# Altium PCB Multipler.PcbDoc
Units mil, origin at the board's own origin, x right, y up, seen from the top; angles counter-clockwise.
Board outline 6000 x 4000 mil, 2 copper layers (Top Layer, Bottom Layer); 13 components, 48 nets, 176 pads, 0 vias.
Unrouted connection lines stored in the file: 102.
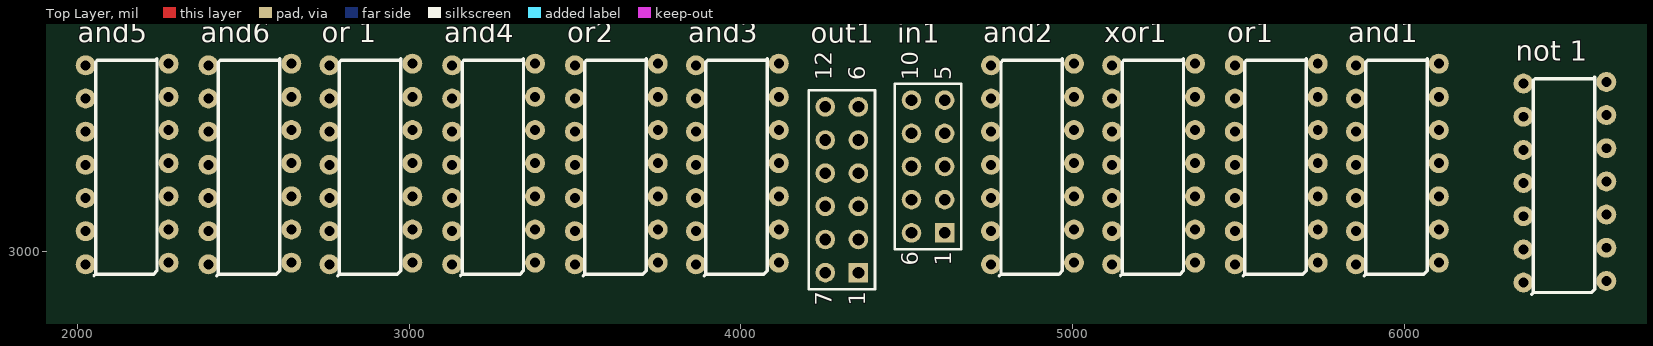
[diagram p0: Top Layer view]
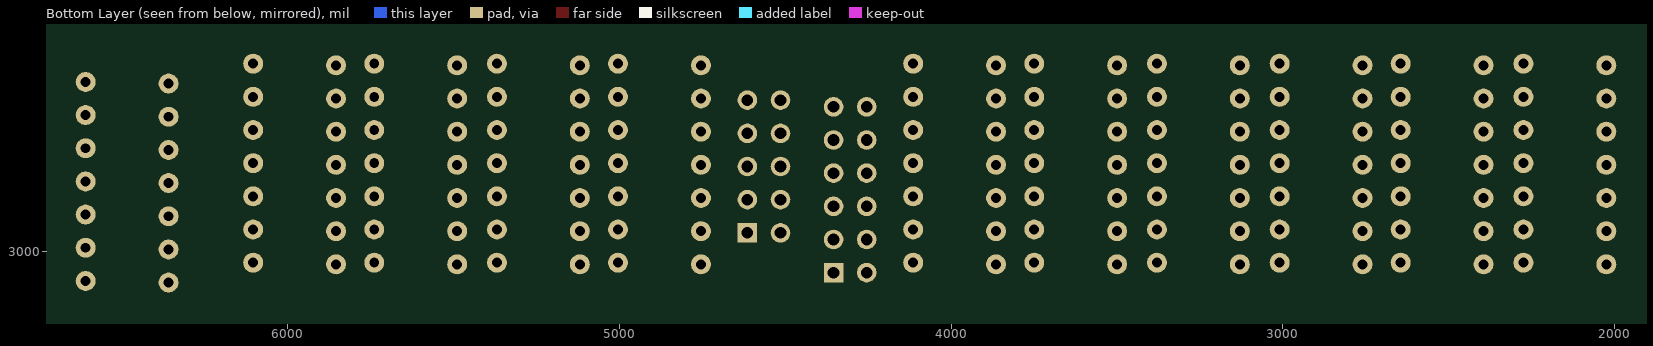
[diagram p1: Bottom Layer view, seen from below]

## Layer stack, top to bottom
Top Solder: solder mask 0.4, Solder Resist, Dk 3.5
Top Layer: signal copper 1.4
Dielectric 1: dielectric 12.6, FR-4, Dk 4.8
Bottom Layer: signal copper 1.4
Bottom Solder: solder mask 0.4, Solder Resist, Dk 3.5

## Board outline
1000,1000 7000,1000 7000,5000 1000,5000

## Design rules (kind name [scope] priority, off if disabled: settings)
Clearance [All] p1: gap=10 ignorepadtopadclearanceinfootprint=FALSE except(0: Arc-Hole Track-Hole SMDPad-Hole THPad-Hole Via-Hole Fill-Hole Poly-Hole Region-Hole Text-Hole)
PolygonConnect [All] p1: connectstyle=Relief reliefconductorwidth=10 reliefentries=4 polygonreliefangle="90 Angle" airgapwidth=10
RoutingVias [All] p1: holewidth=28 width=50 viastyle="Through Hole" minholewidth=28 minwidth=50 maxholewidth=28 maxwidth=50
SolderMaskExpansion [All] p1: expansion=4
Width [All] p1: maxlimit=10 minlimit=10 preferedwidth=10
30 further rules are at their usual default settings.

## Components (designator, comment, footprint, x,y, rotation, side; value= is the part's Value field where it differs from the comment)
and1 "Component_1" PCBComponent_1 6115,2965 r90 top
and2 "Component_1" PCBComponent_1 5015,2965 r90 top
and3 "Component_1" PCBComponent_1 4125,2965 r90 top
and4 "Component_1" PCBComponent_1 3390,2965 r90 top
and5 "Component_1" PCBComponent_1 2285,2965 r90 top
and6 "Component_1" PCBComponent_1 2655,2965 r90 top
in1 "in" HDR2X5_CEN 4615,3055 r90 top
"not 1" "Component_1" PCBComponent_1 6620,2910 r90 top
or1 "Component_1" PCBComponent_1 5750,2965 r90 top
or2 "Component_1" PCBComponent_1 3760,2965 r90 top
"or 1" "Component_1" PCBComponent_1 3020,2965 r90 top
out1 "out" HDR2X6_CEN 4355,2935 r90 top
xor1 "Component_1" PCBComponent_1 5380,2965 r90 top

## Footprints (in the part's own frame and the unit in brackets; to place one, negate y for a bottom-side part, rotate by r counter-clockwise, add the part's x,y. Pads: shape width x height; smd on the part's side, far side on the other; paste and mask are expansions set on the pad)
HDR2X5_CEN [mm] "Connector; Header; 5x2 Position"
  rect 1.5x1.5 hole 0.9: 1(0,0)
  round 1.5 hole 0.9: 2(2.54,0) 3(5.08,0) 4(7.62,0) 5(10.16,0) 6(0,2.54) 7(2.54,2.54) 8(5.08,2.54) 9(7.62,2.54) 10(10.16,2.54)
  silkscreen extent -1.27,-1.27 11.43,3.81
HDR2X6_CEN [mm] "Connector; Header; 6x2 Position"
  rect 1.5x1.5 hole 0.9: 1(0,0)
  round 1.5 hole 0.9: 2(2.54,0) 3(5.08,0) 4(7.62,0) 5(10.16,0) 6(12.7,0) 7(0,2.54) 8(2.54,2.54) 9(5.08,2.54) 10(7.62,2.54) 11(10.16,2.54) 12(12.7,2.54)
  silkscreen extent -1.27,-1.27 13.97,3.81
PCBComponent_1 [mil]
  round 60 hole 30: 1(0,10) 2(100,10) 3(200,10) 4(300,10) 5(400,10) 6(500,10) 7(600,10) 8(595,260) 9(495,260) 10(395,260) 11(295,260) 12(195,260) 13(95,260) 14(-5,260)
  silkscreen extent -40,45 615,235

## Part data
in1: library part "Header 5X2A", "Header, 5-Pin, Dual row", LatestRevisionDate=17-Jul-2002, LatestRevisionNote="Re-released for DXP Platform.", Publisher="Altium Limited"
out1: library part "Header 6X2A", "Header, 6-Pin, Dual row", LatestRevisionDate=17-Jul-2002, LatestRevisionNote="Re-released for DXP Platform.", Publisher="Altium Limited"

## Nets (pads, with @x,y where several pads share a name; then routed paths per layer and width w, separated by ;. In a path a pad name is that pad's centre, name@x,y a point inside that pad or via, vN(x,y) a via of type N, cw(c..) or ccw(c..) an arc to the next point about the centre after c; other vN are vias at no path point)
+5: "not 1.14" "or 1.14" and1.14 and2.14 and3.14 and4.14 and5.14 or1.14 or2.14 xor1.14
a1: and3.6 and3.13
a2: "or 1.3" and3.2
a3: and4.5 xor1.6
a4: and5.9 xor1.3
b1: and3.12 or1.3
b3: "or 1.13" and4.6
c0: "not 1.1" in1.6 out1.1
c0b: "not 1.2"
c1: "not 1.3" and2.9 and4.12 and6.10 in1.7 or1.1 or1.5 xor1.5
c1b: "not 1.4" and2.2 and5.12 or2.1
c2: "not 1.5" "or 1.1" "or 1.5" and1.2 and2.12 and3.9 in1.8 or1.2 xor1.2
c2b: "not 1.6" and1.12 and4.2 and5.5 and6.5
c3: "not 1.13" "or 1.2" and2.5 and3.5 and3.10 and5.13 in1.9 or2.2
c3b: "not 1.12" and4.13 and5.2 and6.2 or1.4 xor1.4
c4: "not 1.11" and1.13 and3.1 and4.1 and5.1 and6.1 in1.10
c4b: "not 1.10" "or 1.4" and1.1 and2.1 and3.4 xor1.1
d1: and3.11 or1.13
G3: "or 1.6" and4.9
GND: "not 1.7" "or 1.7" and1.7 and2.7 and3.7 and4.7 and5.7 and6.7 or1.7 or2.7 xor1.7
h3: "or 1.9" and2.11
k7: and1.8 or2.13
l7: and1.6 or2.12
Netand1_3: and1.3 and1.4
Netand1_10: and1.10 and1.11
Netand2_3: and2.3 and2.4
Netand2_6: and2.6 and2.13
Netand4_3: and4.3 and4.4
Netand4_10: and4.10 and4.11
Netand5_3: and5.3 and5.4
Netand5_10: and5.10 and5.11
Netand6_3: and6.3 and6.4
Netand6_6: and6.6 and6.9
Netor1_10: or1.10 or1.11
"Netor 1_10": "or 1.10" "or 1.11"
t0: or1.8 out1.5
t1: and3.3 out1.6
u1: "or 1.8" out1.2
u2: or2.11 out1.3
u3: or2.6 out1.4
v3: "or 1.12" and4.8
w4: and5.8 or2.5
x1: and2.10 and3.8
x7: and1.5 or1.6
y1: and2.8 or1.12
y4: and6.11 or2.4
y7: and1.9 or2.3
z1: and5.6 or1.9
pads on no net: "not 1.8" "not 1.9" and6.8 and6.12 and6.13 and6.14 in1.1 in1.2 in1.3 in1.4 in1.5 or2.8 or2.9 or2.10 out1.7 out1.8 out1.9 out1.10 out1.11 out1.12 xor1.8 xor1.9 xor1.10 xor1.11 xor1.12 xor1.13

## Text inside footprints (layer, text, board x,y; h text height)
in1: Top Overlay "6" at 4535,2955 h50 r90; Top Overlay "10" at 4535,3515 h50 r90; Top Overlay "5" at 4635,3515 h50 r90; Top Overlay "1" at 4635,2955 h50 r90
out1: Top Overlay "7" at 4275,2835 h50 r90; Top Overlay "1" at 4375,2835 h50 r90; Top Overlay "6" at 4375,3515 h50 r90; Top Overlay "12" at 4275,3515 h50 r90